# Altium PCB VCO.PcbDoc (part 3 of 3)
Units mil, origin at the board's own origin, x right, y up, seen from the top; angles counter-clockwise.
Board outline 4000 x 2000 mil, 4 copper layers (Top Layer, Signal Layer 1, Signal Layer 2, Bottom Layer), stack 60.6 mil thick; 123 components, 70 nets, 383 pads, 321 vias.
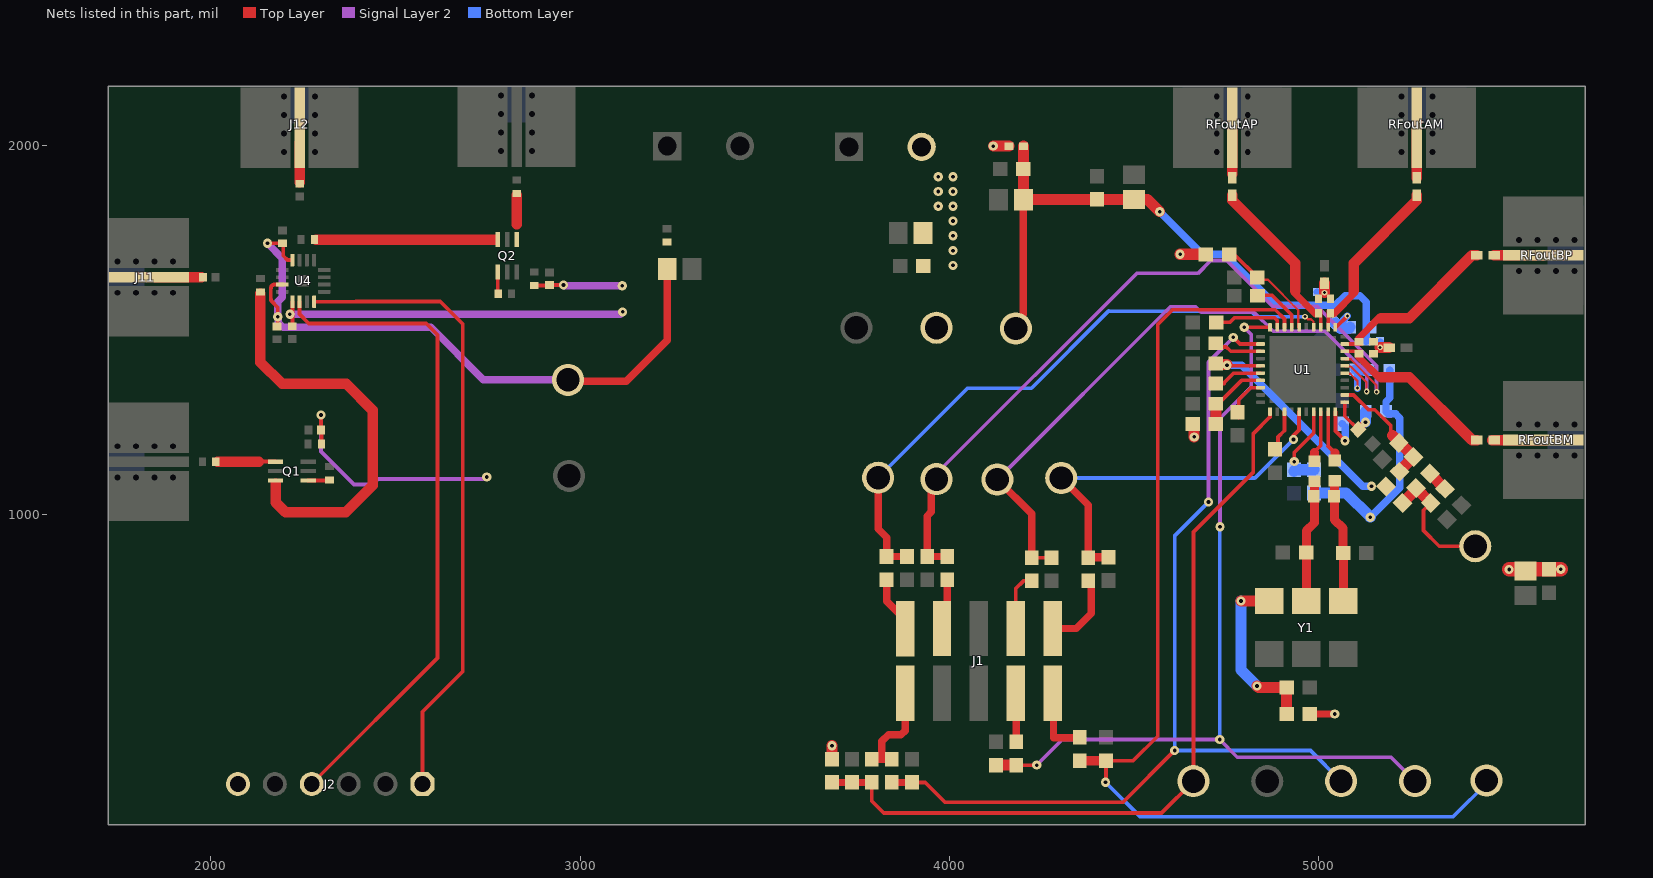
[diagram p4: the nets of this part, all layers, seen from the top]

## Via types
v1: diameter 25, hole 16, Top Layer to Bottom Layer, 152 vias
v2: diameter 25, hole 10, Top Layer to Bottom Layer, 148 vias
v3: diameter 19.68, hole 7.87, Top Layer to Bottom Layer, 12 vias
v4: diameter 15, hole 8, Top Layer to Bottom Layer, 7 vias
v5: diameter 25, hole 10, Top Layer to Bottom Layer, tented both sides, 1 vias
v6: diameter 24, hole 10, Top Layer to Bottom Layer, 1 vias

## Nets (pads, with @x,y where several pads share a name; then routed paths per layer and width w, separated by ;. In a path a pad name is that pad's centre, name@x,y a point inside that pad or via, vN(x,y) a via of type N, cw(c..) or ccw(c..) an arc to the next point about the centre after c; other vN are vias at no path point) (continued)
NetC1_LF_1: C1_LF.1 C2_LF.1 R3_LF.1 U1.12 | length 318.3
  Top Layer w10: U1.12@5071.17,1325.1 5094.9,1325.1 5134.9,1285.1 5152.4,1285.1 5195.43,1242.07 5195.43,1220.03
  Top Layer w30: 5200.2,1215 C2_LF.1@5258.43,1156.77 ; R3_LF.1@5219.53,1117.17 5219.53,1118.97 C2_LF.1@5257.33,1156.77
NetC2_LF_2: C2_LF.2 R2_LF.1 | length 57.7
  Top Layer w30: C2_LF.2@5302.97,1112.23 5302.97,1110.73 R2_LF.1@5342.73,1070.97
NetC3_LF_1: C3_LF.1 R3_LF.2 R4_LF.2 VTune_TP.1 | length 351.6
  Top Layer w10: C3_LF.1@5303.59,1032.37 5284.3,1013.08 5284.3,957.7 5326.7,915.3 VTune_TP.1@5424.3,915.3
  Top Layer w20: R3_LF.2@5264.07,1069.23 R3_LF.2@5264.07,1072.63
  Top Layer w30: R4_LF.2@5227.27,1032.43 R3_LF.2@5264.07,1069.23 ; R3_LF.2@5264.07,1072.63 C3_LF.1@5303.59,1033.11
NetC4_LF_2: C4_LF.2 R4_LF.1 U1.35 | length 673.6
  Top Layer w9.85: C4_LF.2@4722,1410.6 4728.75,1403.84 v2@4751.9,1403.84 ; v2@4759.1,1403.84 U1.35@4842.83,1403.84
  Top Layer w30: C4_LF.2@4722,1408 v2@4752,1408
  Bottom Layer w20: v2(4751.9,1405.5) 4791.9,1405.5 5119.52,1077.88 v2(5143.35,1077.88)
NetC5_1: C5.1 RFoutAP.1 | length 141.4
  Top Layer w24: RFoutAP.1@4766.06,2037.18 RFoutAP.1@4766.06,2051.62 ; RFoutAP.1@4766.5,2037.63 RFoutAP.1@4767,2037.13
  Top Layer w28.5: C5.1@4766,1923.62 RFoutAP.1@4766,2049.9
NetC5_2: C5.2 R37.1 U1.23 | length 478.3
  Top Layer w9.84: R37.1@4999.9,1546.41 R37.1@5006.21,1540.1 ; U1.23@5006.21,1508.17 R37.1@5006.21,1553
  Top Layer w19: 4933.21,1602.59 R37.1@4991.1,1544.7 ; 4940.61,1597.59 4940.61,1610.99
  Top Layer w28.5: C5.2@4766.06,1865.68 4766.06,1852.65 4766,1852.6 4936.3,1682.3 4936.3,1607
NetC6_2: C6.2 L1.2 R37.2 R38.2 | length 46.2
  Top Layer w30: v4@5016.06,1602.05 C6.2@5016.06,1627.88
  Bottom Layer w20: L1.2@4996.42,1603.94 4998.36,1602 v4(5016,1602)
NetC7_1: C7.1 RFoutAM.1 | length 137
  Top Layer w28.5: RFoutAM.1@5266,2048 RFoutAM.1@5266,2049.9 ; C7.1@5266.06,1912.92 RFoutAM.1@5266.06,2048
NetC7_2: C7.2 R38.1 U1.22 | length 478.3
  Top Layer w9.84: U1.22@5025.9,1508.17 R38.1@5025.9,1553 ; R38.1@5025.9,1540.1 R38.1@5032.21,1546.41
  Top Layer w19: R38.1@5041.01,1544.7 5098.9,1602.59 ; 5091.1,1596.1 5091.1,1609.5
  Top Layer w28.5: 5095.81,1607 5095.81,1682.3 5266.11,1852.6 5266.11,1865.62 C7.2@5266.06,1865.68
NetC10_1: C10.1 RFoutBP.1 | length 202.4
  Top Layer w24: RFoutBP.1@5614.72,1703.06 RFoutBP.1@5682,1703.06
  Top Layer w28.5: C10.1@5475.92,1703.11 5475.98,1703.06 RFoutBP.1@5611,1703.06
NetC10_2: C10.2 R39.1 U1.19 | length 469.2
  Top Layer w9.84: U1.19@5071.17,1462.9 R39.1@5116,1462.9
  Top Layer w19: R39.1@5107.7,1478.11 5165.59,1535.9 ; 5162.2,1527.9 5175.6,1527.9
  Top Layer w28.5: 5170,1532.81 5245.3,1532.81 5415.6,1703.11 C10.2@5428.68,1703.11
NetC11_2: C11.2 L2.2 R39.2 R40.1 | length 38.7
  Top Layer w30: v4(5166.7,1453.7) 5167.34,1453.06 C11.2@5190.88,1453.06
  Bottom Layer w20: v4(5166.7,1453.7) L2.2@5166.7,1468
NetC12_1: C12.1 RFoutBM.1 | length 144.7
  Top Layer w24: RFoutBM.1@5614.67,1203 RFoutBM.1@5614.72,1203.06
  Top Layer w28.5: C12.1@5470.04,1203 RFoutBM.1@5614.67,1203
NetC12_2: C12.2 R40.2 U1.18 | length 469.3
  Top Layer w9.84: U1.18@5071.17,1443.21 R40.2@5116,1443.21
  Top Layer w19: R40.2@5107.7,1428.1 5165.59,1370.21 ; 5160,1378 5173.4,1378
  Top Layer w28.5: 5170,1373.3 5245.3,1373.3 5415.6,1203 C12.2@5428.68,1203
NetC13_1: C13.1 R33.1 Y1.6 | length 479
  Top Layer w30: v2(4790.05,767.05) Y1.6@4867,767.05 ; v2(4833,537) 4837,533 C13.1@4913.5,533 R33.1@4913.5,461
  Bottom Layer w30: v2(4790.05,767.05) 4790.05,579.95 v2(4833,537)
NetC14_1: C14.1 R27.2 R32.2 Y1.5 | length 333.3
  Top Layer w24: Y1.5@4967,767.05 4967,897.5 R27.2@4966.5,898 4967,898.5 4967,957 4989,979 C14.1@4989,1090.84
NetC14_2: C14.2 U1.8 | length 150.7
  Top Layer w9.84: 5006.21,1188.21 U1.8@5006.21,1279.83
  Top Layer w10: 4988,1170 5005.5,1187.5
  Top Layer w24: C14.2@4987.9,1148.7 C14.2@4988,1160 ; C14.2@4989,1145.96 4989,1169
NetC15_1: C15.1 R28.2 R32.1 Y1.4 | length 334.1
  Top Layer w24: C15.1@5042.68,1091.04 5042.68,987.32 5066.5,963.5 R28.2@5066.5,897 5067,896.5 Y1.4@5067,767.05
NetC15_2: C15.2 U1.9 | length 137.8
  Top Layer w9.84: 5025.9,1186.89 U1.9@5025.9,1279.83
  Top Layer w10: 5025.5,1186.5 5043,1169
  Top Layer w24: C15.2@5044.18,1147.66 5044.18,1167.82
NetC18_2: C18.2 R36.1 U1.26 | length 296.4
  Top Layer w6: C18.2@4834.3,1643 4840.24,1637.06 4862.78,1637.06 4945,1554.84 U1.26@4945,1508.17
  Top Layer w10: R36.1@4757.7,1705.5 4771.8,1705.5 C18.2@4834.3,1643
NetC19_2: C19.2 U1.27 | length 148.4
  Top Layer w10: C19.2@4834.53,1595.03 4873.87,1595.03 4927.47,1541.43 U1.27@4927.47,1508.17
NetC20_1: C20.1 U1.29 | length 192.4
  Top Layer w9.8: 4759.8,1521.7 4772.3,1534.2 4880.6,1534.2 4888.1,1526.7 U1.29@4888.1,1508.17
  Top Layer w10: C20.1@4722.5,1521.7 4759.8,1521.7
NetC21_2: C21.2 U1.33 | length 116.8
  Top Layer w10: C21.2@4731,1455 4750,1455 4761.79,1443.21 U1.33@4842.87,1443.23
NetC22_1: C22.1 U1.36 | length 134.2
  Top Layer w10: C22.1@4721.8,1356.2 4744.48,1356.2 4744.48,1358.88 4769.76,1384.16 U1.36@4842.87,1384.11
NetC23_2: C23.2 R41.1 U1.37 | length 185.1
  Top Layer w10: C23.2@4736,1309 4791.47,1364.47 U1.37@4842.83,1364.47
  Top Layer w30: R41.1@4721.6,1246.1 4721.6,1301.1 C23.2@4721.8,1301.3
NetC24_2: C24.2 U1.38 | length 121.7
  Top Layer w10: C24.2@4783.6,1263.3 4783.6,1312.4 4815.99,1344.79 U1.38@4842.83,1344.79
NetC25_1: C25.1 U1.3 | length 123.2
  Top Layer w10: C25.1@4888.43,1163.6 4890,1165.16 4890,1211 4907.07,1228.07 ; 4907.79,1228.79 U1.3@4907.79,1279.83
NetC26_2: C26.2 R43.2 U1.11 | length 146.3
  Top Layer w10: U1.11@5071.17,1305.42 5071.17,1267.53 C26.2@5107.21,1231.49
  Top Layer w20: C26.2@5107.21,1231.49 v2(5127.03,1251.3)
  Bottom Layer w30: v2(5127.03,1251.3) 5127.03,1280.06 R43.2@5127.49,1280.52
NetC27_2: C27.2 R42.2 U1.7 | length 212.7
  Top Layer w10: v2(4934,1144.56) 4934,1169 4986.53,1221.53 U1.7@4986.55,1279.87
  Bottom Layer w30: C27.2@4933.3,1118.46 4937.33,1122.49 R42.2@4987.24,1122.49
NetC28_2: C28.2 U1.10 | length 138.8
  Top Layer w10: U1.10@5045.58,1279.83 5045.58,1227.12 v2(5071.7,1201)
  Bottom Layer w20: C28.2@5064.15,1247.01 5071.7,1239.45 v2(5071.7,1201)
NetC29_1: C29.1 R44.2 U1.15 | length 146
  Top Layer w6: U1.15@5071.17,1382.24 5086.1,1382.24 5105.3,1363.04 v4(5105.3,1343.6)
  Bottom Layer w20: C29.1@5103.56,1393 5103.76,1392.8 5105.3,1391.26 v4(5105.3,1343.6)
  Bottom Layer w30: C29.1@5102,1394.56 C29.1@5103.56,1393 ; C29.1@5103.76,1392.8 R44.2@5135.94,1392.8
NetC30_2: C30.2 R45.2 U1.21 | length 126.8
  Top Layer w10: U1.21@5045.58,1508.17 5047.17,1508.17 v4(5078,1539)
  Bottom Layer w20: C30.2@5044.69,1519.69 C30.2@5044.69,1520.19 ; C30.2@5045.71,1519.69 C30.2@5062,1519.69 ; 5066.68,1527.68 v4(5078,1539)
  Bottom Layer w30: C30.2@5044.69,1519.69 5045.71,1519.69 5059.15,1506.25 5059.15,1505.25 5081.79,1505.25 R45.2@5085.45,1508.91
NetC102_1: C102.1 C103.1 C106.1 Hvoltage_TP.1 R107.1 U4.12 U4.15 | length 1858.6
  Top Layer w10: v2(2153,1736) C103.1@2194,1735.99 2195.77,1734.22 2195.77,1701.81 2207.09,1690.5 U4.12@2220.47,1690.5 ; C106.1@3232.2,1662.66 C106.1@3235.74,1666.2
  Top Layer w10.5: C102.1@2179,1510.01 2181,1512.01 v2(2181,1537) 2181,1562 2165.08,1577.92 cw(c2172.5,1585.35) 2162,1585.35 2162,1613.59 cw(c2172.5,1613.59) 2172.5,1624.09 2192.34,1624.09 ccw(c2192.34,1634.59) 2192.89,1624.11 U4.15@2193.48,1624.14
  Top Layer w20: Hvoltage_TP.1@2967,1366 2971,1362 3125,1362 3235.74,1472.74 C106.1@3235.74,1666.2 ; C106.1@3232.2,1662.66 C106.1@3234.2,1660.66
  Signal Layer 2 w20: v2(2153,1736) 2193.5,1695.5 2193.5,1590.18 2181,1577.68 v2(2181,1537) 2181.96,1536.05 2181.96,1521.26 2195.22,1508 2596,1508 2738,1366 Hvoltage_TP.1@2967,1366
NetC107_2: C107.2 J11.1 | length 143
  Top Layer w28.5: J11.1@1831,1644 C107.2@1974,1644
NetC108_2: C108.2 J12.1 | length 107.2
  Top Layer w28.5: J12.1@2240.04,2008.24 C108.2@2240.15,1901
NetCE_TP_1: CE_TP.1 R2.2 R3.2 R4.2 U1.1 | length 2166
  Top Layer w10: R4.2@3790,275.5 3790,225 3822.2,192.8 4574.8,192.8 CE_TP.1@4661,279 4661,953.93 4823.37,1116.3 4823.37,1221 4867.22,1264.85 4868.42,1264.85 U1.1@4868.42,1279.83
  Top Layer w20: R2.2@3682,275.5 R3.2@3736,275.5 R4.2@3790,275.5
NetCSB_TP_1: CSB_TP.1 R16.2 R17.2 U1.24 | length 1677.7
  Top Layer w5: U1.24@4985,1509.7 U1.24@4986.53,1508.17
  Top Layer w6: v4(4963.2,1537.21) 4970.41,1530 4979.67,1530 4986.53,1523.15 U1.24@4986.53,1504.17
  Top Layer w20: CSB_TP.1@3807,1101 3807,962.1 3830,939.1 R16.2@3830,887.5 R17.2@3885,887.5
  Bottom Layer w10: CSB_TP.1@3807,1101 4049.1,1343.1 4222.1,1343.1 4431.3,1552.3 4431.5,1552.1 4816.4,1552.1 4831.3,1537.21 v4(4963.2,1537.21)
NetJ1_1: J1.1 R4.1 R5.2 | length 282
  Top Layer w10: J1.1@3876.5,514 J1.1@3880,517.5
  Top Layer w20: R4.1@3790,338.5 3815,338.5 ; R5.2@3844,338.5 3817,338.5 3817,387 3835,405 3869,405 3880,416 J1.1@3880,517.5
NetJ1_2: J1.2 R16.1 | length 153.7
  Top Layer w20: R16.1@3830,824.5 3830,766 3880,716 J1.2@3880,691.5
NetJ1_4: J1.4 R19.2 | length 137.8
  Top Layer w20: J1.4@3980,692.5 3994,706.5 R19.2@3994,824.5
NetJ1_7: J1.7 R8.1 | length 132.4
  Top Layer w20: J1.7@4180,517.5 4181,516.5 R8.1@4181,385.5
NetJ1_8: J1.8 R20.1 | length 160
  Top Layer w10: J1.8@4180,692.5 4180,801 4200.5,821.5 R20.1@4223,821.5
NetJ1_9: J1.9 R9.1 | length 192.5
  Top Layer w20: J1.9@4280,517.5 4282,515.5 4282,397 4352.5,397 R9.1@4353,397.5
NetJ1_10: J1.10 R22.1 | length 213.3
  Top Layer w20: J1.10@4280,692.5 4344,692.5 4384.5,733 4384.5,813 R22.1@4376,821.5
NetQ1_1: Q1.1 R102.1 | length 157.2
  Top Layer w10.5: 2130,1144 2130.59,1144.59 Q1.1@2174.91,1144.59
  Top Layer w28.5: R102.1@2018,1144 2130,1144
NetQ1_3: Q1.3 R108.2 | length 1101.8
  Top Layer w28.5: R108.2@2134,1599 2134,1414 2193,1355 2366,1355 2438,1283 2438,1080 2365,1007 2202,1007 2174.91,1034.09 2174.91,1085.06
NetQ1_4: Q1.4 R103.2 | length 58.6
  Top Layer w10: Q1.4@2263.09,1093.41 2319.4,1093.41 R103.2@2321,1095.01
NetQ2_1: Q2.1 R105.1 | length 78.9
  Top Layer w28.5: 2828,1787.14 R105.1@2828,1866
NetQ2_3: Q2.3 R109.2 | length 483.6
  Top Layer w28.5: R109.2@2285,1746 2768.56,1746
NetQ2_4: Q2.4 R106.2 | length 59.5
  Top Layer w10: Q2.4@2776.91,1658 2776.91,1600.1 R106.2@2778.01,1599
NetR18_2: R18.2 R19.1 SDI_TP.1 U1.17 | length 2061
  Top Layer w6: U1.17@5071.17,1421.61 5087.07,1421.61 5157,1351.68 v4(5157,1333.4) v4@5160.7,1333.4
  Top Layer w20: SDI_TP.1@3940,1087 3951,1098 3951,1008.3 3940,997.3 R18.2@3940,887.5 R19.1@3994,887.5
  Signal Layer 2 w10: SDI_TP.1@3951,1098 4507.3,1654.3 4673.1,1654.3 4708.04,1689.24 4751.46,1689.24 4875.2,1565.5 4995.38,1565.5 5157,1403.9 v4(5157,1333.4)
NetR20_2: R20.2 R21.2 SCK_TP.1 U1.16 | length 1723.8
  Top Layer w6: U1.16@5071.17,1401.92 5087.16,1401.92 5130.1,1358.98 v4(5130.1,1334.4)
  Top Layer w10: R20.2@4223,884.5 R21.2@4277,884.5
  Top Layer w20: SCK_TP.1@4130,1096 4223,1003 R20.2@4223,884.5
  Signal Layer 2 w10: SCK_TP.1@4130,1096 4598.15,1564.15 4666.93,1564.15 4681.8,1549.28 4825.4,1549.28 4877.18,1497.5 5017.1,1497.5 5130.1,1384.5 v4(5130.1,1334.4)
RAMPCLK: R7.2 R8.2 RampCLK_TP.1 U1.30 | length 2472.6
  Top Layer w10: 4154,322.5 R8.2@4181,322.5 v2(4236.5,322.5) ; v2(4798.83,1508.17) U1.30@4868.42,1508.17
  Top Layer w20: R7.2@4126,322.5 R7.2@4130.5,318
  Top Layer w30: R7.2@4126,322.5 R8.2@4181,322.5
  Signal Layer 2 w10: v2(4236.5,322.5) 4305.99,392 v2(4732,392) 4780,344 5196,344 RampCLK_TP.1@5261,279 ; v2(4733,968) 4733.1,968.1 4733.1,1261.9 4817.2,1346 4817.2,1489.8 v2(4798.83,1508.17)
  Bottom Layer w10: v2(4732,392) 4732,967 v2(4733,968)
RAMPDIR: R5.1 R6.2 RampDIR_TP.1 U1.32 | length 2597.8
  Top Layer w10: R6.2@3899,275.5 3934.5,275.5 3988,222 4470,222 v2(4610,362) ; v2(4769,1481) 4787.1,1462.9 U1.32@4842.87,1462.9
  Top Layer w20: R5.1@3844,275.5 R6.2@3899,275.5
  Signal Layer 2 w10: v2(4702,1035) 4702,1414 v2(4769,1481)
  Bottom Layer w10: v2(4702,1035) 4618,951 4610,943 v2(4610,362) 4978,362 RampDIR_TP.1@5061,279
SCLK: J2.4 U4.2 | length 1788.7
  Top Layer w10.5: U4.2@2240.16,1577.5 2240.16,1543.84 2265,1519 2583,1519 2613.75,1488.25 2613.75,612.75 2273,272 J2.4@2273,271
SS: J2.1 U4.4 | length 1719.1
  Top Layer w10.5: U4.4@2279.53,1577.5 2392.5,1577.5 2393,1578 2621,1578 2682,1517 2682,576 2573,467 J2.1@2573,271
SYNC: R22.2 R23.2 SYNC_TP.1 U1.5 | length 1057.2
  Top Layer w10: v2(4932,1204.5) 4932,1215 4947.16,1230.16 U1.5@4947.16,1279.83
  Top Layer w20: SYNC_TP.1@4303,1100 4376,1027 R22.2@4376,884.5 R22.2@4377,885.5 ; R23.2@4431,885.5 R23.2@4432.5,887
  Top Layer w24: R22.2@4377,885.5 R23.2@4431,885.5
  Bottom Layer w10: SYNC_TP.1@4303,1100 4827.5,1100 v2(4932,1204.5)
SYSREFREQ: R9.2 R10.2 SysRefReq_TP.1 U1.28 | length 2922
  Top Layer w9.8: R10.2@4424,334.5 4497.5,334.5 4564,401 4564,1515.75 4604.25,1556 4882.5,1556 4907.79,1530.71 U1.28@4907.79,1508.17
  Top Layer w10: v2(4423,276) 4424,277 R10.2@4424,334.5
  Top Layer w25: R9.2@4353,334.5 R10.2@4424,334.5
  Bottom Layer w10: v2(4423,276) 4516,183 5365,183 SysRefReq_TP.1@5461,279
VCC: C3.2 C4.2 C16.2 C17.2 C101.2 C104.1 C105.1 J2.6 J3.2 L3.1 R2.1 R33.2 R36.2 R41.2 R42.1 R43.1 R44.1 R101.2 R104.2 U4.1 Vcc_TP.1 | length 2907.5
  Top Layer w10.5: C101.2@2220.01,1506 2220.47,1506.46 U4.1@2220.47,1577.5 ; v2(2298,1271) C104.1@2298.01,1230 2298.99,1229.02 R101.2@2298.99,1192 ; R104.2@2876,1622.01 2916.02,1622.01 C105.1@2917,1622.98 v2(2955,1623)
  Top Layer w20: R33.2@4976.5,461 v2(5044,461)
  Top Layer w30: R2.1@3682,338.5 v2(3682,375) ; v2(4119,1999) L3.1@4161.31,1999 ; v2(4624.98,1706.2) R36.2@4676.1,1706.2 ; R41.2@4658.6,1246.1 4663.1,1241.6 v2(4663.1,1211.5)
  Top Layer w40: J3.2@3924.85,1997 J3.2@3926.85,1999 ; v2@5516.5,853 v2(5656,853)
  Signal Layer 2 w10.5: v2(2298,1271) 2298,1172 2387,1083 2438,1083 2452,1097 2737.08,1097 2743.08,1103 v2(2747,1103)
  Signal Layer 2 w20: v2(2213.78,1543.65) 3108.65,1543.65 v2(3115,1550) ; v2(2955,1623) 2957,1621 v2(3114,1621)
  Bottom Layer w20: v2(3114,1621) v2@3114.5,1620.5 ; v2@3114.5,1550.5 v2(3115,1550) ; v2(5140,994) 5220.2,1074.2 5220.2,1262.07 5208.48,1273.79 5188.35,1273.79 R43.1@5182.6,1279.53 ; R43.1@5182.6,1280.52 5182.6,1287.25 5182.6,1306.5 5192.86,1316.76 R44.1@5192.86,1392.8
  Bottom Layer w30: R42.1@4987.24,1059.5 5074.5,1059.5 v2(5140,994)
  other v2: 5516,852.5 4010,1676 4010,1716 4010,1756 4010,1796 3970,1836 4010,1836 3970,1876 4010,1876 3970,1916 4010,1916
VccRF: C1.2 C2.2 C8.2 C9.2 L1.1 L2.1 L3.2 R45.1 VccRF_TP.1 | length 1673.8
  Top Layer w20: VccRF_TP.1@4180,1505 4180,1523.13 4200.46,1543.59 C2.2@4200.46,1854
  Top Layer w30: L3.2@4200.69,1999 4200.69,1937.19 C1.2@4200.5,1937 4200.5,1855.03 4201.02,1854.5 C9.2@4400,1854.5 C8.2@4500,1854.54 ; C8.2@4500,1854.54 4536.46,1854.54 v2(4569.6,1821.4)
  Bottom Layer w20: v2(4569.6,1821.4) 4656.3,1734.7 4684.7,1706.3 4745.3,1706.3 4884,1567.6 5044.8,1567.6 5071.4,1594.2 5112.1,1594.2 5129.5,1576.8 L2.1@5129.5,1470.8
pads on no net: J1.5 U4.5 U4.6 U4.8 U4.16 Y1.1 Y1.2

## Polygon pours and split planes (outlines as drawn)
GND on Top Layer "GND_L01_P138" (solid, remove dead copper, pour order 138): 5696.3,1042.5 5439.4,1042.5 5188.3,1293.6 4609.6,1872.3 4609.6,2133.5 5703.5,2133.5
GND on Top Layer "GND_L01_P143" (solid, remove dead copper, pour order 143): 2403,2155.03 2403,1833.65 2145.67,1486 1725.5,1486 1725.5,2159.5
GND on Top Layer "GND_L01_P145" (solid, remove dead copper, pour order 145): 2268.43,2160.21 3061.19,2160.21 3061.19,1680 2265.26,1680
GND on Top Layer "GND_L01_P144" (solid, remove dead copper, pour order 144): 2557,1488.15 2557,862.99 1720.84,863 1720.84,1493.67
VCC on Signal Layer 2 "VCC_L03_P122" (solid, remove dead copper, pour order 122): 2008,484 2008,170 5684.4,170 5684.4,1022.6 5683.3,1023.7 5412.8,1023.7 5155.9,1280.6 4861.4,1280.6 4860.7,1281.3 4860.7,1569.3 4678.2,1751.8 4287,2143 3074,2143 3074,1550
GND on Signal Layer 1 "GND_L02_P142" (solid, remove dead copper, pour order 142): 5697.7,171.21 5697.7,2142.1 3277.7,2142.1 1722,2142.1 1722,171.21 3419.51,171.21 5554.39,171.21
GND on Bottom Layer "GND_L04_P126" (solid, remove dead copper, pour order 126): 1722,2136.03 5671.88,2136.03 5671.88,168 1722,168

## Keep-outs
Top Layer:
  region: 3848,2083

## Other copper
Top Layer:
  rectangle net GND: 4868.42,1305.42 5046,1483
  pour cut-out: 1972,1119.27 2018,1119.27 2018,1168.73 1972,1168.73
  pour cut-out: 2852.73,1866 2852.73,1912 2803.27,1912 2803.27,1866
  pour cut-out: 2853,1850
  pour cut-out: 2264,1940 2265,1939 2265,1822 2216,1822 2215.42,1822.58 2215.42,1939.42 2216,1940
  pour cut-out: 1962,1669 2029,1669 2029,1619 1962,1619
  region net NetC102_1: 3222.2,1749.2 3222.2,1682.2 3239.2,1682.2 3247.2,1690.2 3247.2,1749.2
  region net 15V: 3222,1765 3222,1934.5 3197,1959.5 3197,2037.5 3274,2037.5 3274,1960.5 3247,1933.5 3247,1765
  pour cut-out: 2350,1699
  pour cut-out: 2339,1730
  pour cut-out: 2330,1720
  pour cut-out: 2362.2,1732.28 2291.34,1732.28 2275.59,1732.28
  pour cut-out: 2264.88,1735.25
  region net NetQ2_1: 2814,1787.14 2828,1742.14 2842,1787.14
  region net Dout2: 2226,1735.1 2240,1690.1 2254.3,1735.1
  region net Dout1: 2151.59,1629.86 2195.91,1644.59 2151.59,1658.12
  region net NetQ1_1: 2130.59,1129.86 2174.91,1144.59 2130.59,1158.12
  region net NetQ1_1: 2131,1130
  region net GND: 3650,2087 3650,1885 3794,1741 3794,1648 3886,1648 3886,1734 3887,1735 3887,1854 3817,1924 3817,2088 3801,2104 3669,2104
  region net VCC: 3903,1896 3846,1953 3846,2076 3873,2103 4026,2103 4045,2084 4045,1663 4026,1644 3913,1644 3903,1654
  region net NetC6_2: 5041.9,1597.4 5041.9,1597.8 5027.6,1612.1 5027.5,1612 5004.1,1612 5004.1,1611.6 4989.9,1597.4 4990,1597.3 4990,1573.8 5041.9,1573.8 5041.8,1573.9 5041.8,1597.7
  region net NetC11_2: 5160.6,1427 5161,1427 5175.3,1441.3 5175.2,1441.4 5175.2,1464.8 5174.8,1464.8 5160.6,1479 5160.5,1478.9 5137,1478.9 5137,1427 5137.1,1427.1 5160.9,1427.1
  pour cut-out: 4741.3,1928.5 4741.5,1928.3 4741.5,1859.3 4787.24,1859.3 4790.9,1862.96 4790.9,1928.5 4741.4,1928.5 4741.3,1928.4
  pour cut-out: 5241.5,1919 5241.39,1918.89 5241.39,1862.96 5288.17,1862.96 5290.84,1865.62 5290.6,1865.86 5290.6,1916.3 5244.5,1916.3 5241.5,1919.3
  pour cut-out: 5481,1727.9 5420.7,1727.9 5420.7,1686.4 5428.8,1678.3 5479.2,1678.3 5479.2,1725.7 5481.2,1727.7
  pour cut-out: 5426.8,1177.9 5427.2,1178.3 5474.6,1178.3 5474.6,1227.1 5475,1227.5 5474.77,1227.73 5425.84,1227.73 5425.84,1179.66 5426.8,1178.7

## Silkscreen, mask and mechanical layers (free items; w line width, h text height)
Top Overlay:
  circle w20: c4867.9,1238.5 r7.07
  text "Input2" at 3032,1999 h30 r90
  text "+3V3" at 4090,1999 h30 r90
  text "+15V" at 3118,1982 h30 r90
  text "Output2" at 2069,1962 h30 r90
  text "Output1" at 1732,1817 h30
  text "GND" at 3370,1768 h30
  text "GND" at 3678,1761 h30
  text "Input1" at 1736,1315 h30
  text "CSB" at 3272,811 h40 r90
  text "SDI" at 3328,808 h40 r90
  text "SCK" at 3419,808 h40 r90
  text "SYNC" at 3475,808 h40 r90
  text "RAMPDIR" at 3272,616 h40 r90
  text "MUXout" at 3328,613 h40 r90
  text "GND" at 3371,613 h40 r90
  text "RampCLK" at 3417,610 h40 r90
  text "SysRefReq" at 3472,610 h40 r90
  text "VCC" at 2096,355 h40 r90
  text "GND" at 2192,354 h40 r90
  text "MOSI" at 2490,354 h40 r90
  text "SCLK" at 2292,351 h40 r90
  text "SS" at 2590,350 h40 r90
Bottom Overlay:
  lines w3: 4759,1296 4763,1299
Top Solder:
  rectangle: 5067,1433 5085,1444
  pour cut-out: 5062.36,1607.57 5053.27,1612.36 5064.05,1636.6 5073.1,1632.19
  pour cut-out: 4979,1640 4970,1635 4979,1614 4990,1619 4980,1640
  lines w50: 5016.5,1528.2 5017.03,1545.02 ; 5097.3,1452 5114.12,1451.47 ; 5428.68,1203 5693,1203
  lines w70: 1722,1144 1977.01,1144 ; 1722,1644 1977.99,1644 2149,1644 ; 2001,1144 1989,1144 2012.99,1144 ; 2018,1144 2119,1144 ; 2240.15,1735.1 2240.15,2144.15 2240.15,1897.01 ; 2279.99,1746 2749,1746 ; 2828,1787.14 2828,1871.01 2828,1906.99 ; 2828,1912 2828,2161 ; 4766.39,1872.7 4767.7,2151.1 ; 4766.65,1853.88 4941.4,1675.6 4942.27,1609.62 ; 4943.11,1600.1 4998.15,1545.12 ; 5041.92,1547.55 5083.15,1588.48 ; 5083.75,1587.79 5083.71,1665.58 5268.61,1855.08 ; 5111.85,1476.2 5166.83,1531.24 ; 5119.5,1431.7 5176.62,1373.31 5244.79,1373.35 ; 5158.6,1530.1 5236.39,1530.15 ; 5245.3,1532.81 5415.6,1703.11 5694,1701.8 ; 5265.19,1866.8 5266.5,2145.2
  lines w80: 5245.3,1373.3 5415.6,1203
Bottom Solder:
  rectangle: 4867.2,1304 5047.8,1484.6
Drill Guide:
  text ".Layer_Name" at 327,-1618.49 h25
M1 Board Outline:
  the board outline again, w4
M5 Assembly Top:
  lines w10: -542,-1283.5 -542,-1893.5 3463,-1893.5 6060,-1893.5 ; -541.5,-1283.5 -541.5,-1893.5 1034,-1893.5
  text "ALL SMA CONNECTORS TO FLUSH TO THE EDGE OF THE BOARD, NO GAP ALLOWED." at 3227.1,2684.2 h40
  text "This is especially critical for:  RFoutAP, RFoutAM, RFoutBP, and RFoutBM SMA connectors" at 3214.1,2574.4 h40
  text "Pin1" at 4875.3,1238.8 h20 r90
M6 Assembly Bottom:
  lines w10: -542.5,-1284 -542.5,-1894 2054.5,-1894 6059.5,-1894 ; 4483.5,-1894 6059,-1894
  text "PLOT NAME =" at 5996,-1824.84 h20
M9 Title Sheet:
  lines w10: -741.5,281.5 -541.5,281.5 ; -741.5,2656.5 -541.5,2656.5 ; -741.5,5031.5 -541.5,5031.5 ; 1758.5,-2093.5 1758.5,-1893.5 ; 4258.5,-2093.5 4258.5,-1893.5 ; 4258.5,7206.5 4258.5,7406.5 ; 6758.5,-2093.5 6758.5,-1893.5 ; 6758.5,7206.5 6758.5,7406.5 ; 9258.5,-2093.5 9258.5,-1893.5 ; 9258.5,7206.5 9258.5,7406.5 ; 11758.5,7206.5 11758.5,7406.5 ; 14058.5,281.5 14258.5,281.5 ; 14058.5,2656.5 14258.5,2656.5 ; 14058.5,5031.5 14258.5,5031.5 ; -741.5,-2093.5 14258.5,-2093.5 14258.5,7406.5 -741.5,7406.5 -741.5,-2093.5 ; -541.5,-1893.5 14058.5,-1893.5 14058.5,7206.5 -541.5,7206.5 -541.5,-1893.5
  text "1" at 489.84,7276.5 h70
  text "3" at 5474.84,7276.5 h70
  text "4" at 7981.51,7276.5 h70
  text "5" at 10480.5,7276.5 h70
  text "6" at 12985.5,7276.5 h70
  text "A" at -666.5,6133.5 h70
  text "A" at 14133.5,6133.5 h70
  text "B" at -666.5,3753.5 h70
  text "B" at 14133.5,3753.5 h70
  text "C" at -666.5,1378.5 h70
  text "C" at 14133.5,1378.5 h70
  text "D" at -666.5,-991.5 h70
  text "D" at 14133.5,-991.5 h70
  text "1" at 489.84,-2023.5 h70
  text "2" at 2985.5,-2023.5 h70
  text "3" at 5474.84,-2023.5 h70
  text "4" at 7981.51,-2023.5 h70
  text "5" at 10480.5,-2023.5 h70
M10 Fab Notes:
  drawing of 223 lines, arcs and shapes, not listed
  text "DESIGN INFORMATION" at 12134.02,6047 h25
  text "(REFER ALSO ARRAY/PANEL PROFILING INFORMATION)" at 11772.46,5885.29 h25
  text "BOARD SIZE" at 11086.46,5881 h25
  text "Finished copper thickness." at 29.7,5810 h100
  text "X" at 12054.46,5753.18 h25
  text "2479MIL" at 12285.78,5753.18 h25
  text "2169MIL" at 11540.78,5745.18 h25
  text "28.5 mil width on top layer should be controlled 50 ohms +/- 5%" at -58,5557 h100
  text "Number of Layers :" at 11489.46,5556 h25
  text "4" at 12584.27,5546 h25
  text "MIN. TRACK WIDTH:" at 11489.46,5417 h25
  text "MIL" at 12740.46,5417 h25
  text "6" at 12577.7,5409 h25
  text "21mil width on bottom layer should be controlled 50 ohms +/- 5%" at -91.3,5329.1 h100
  text "MIN. CLEARANCE:" at 11489.46,5285 h25
  text "6" at 12585.7,5285 h25
  text "MIL" at 12740.46,5285 h25
  text "MIN. VIA PAD SIZE:" at 11489.46,5153 h25
  text "15" at 12555.71,5153 h25
  text "MIL" at 12740.46,5153 h25
  text "GROUND COPPER ON TOP, LAYER2 AND BOTTOM TO NOT TO BE PULLED BACK,  BY DESIGN" at 39.7,5146.7 h100
  text "0.05mm (2MIL)" at 12184.46,5011.29 h25
  text "MINIMUM ANNULAR RING" at 11160.23,5007 h25
  text "EXTERNAL" at 12892.46,5007 h25
  text "PER" at 11360.23,4889 h25
  text "IPC-D-275 CLASS 2 LEVEL C" at 11580.23,4889 h25
  text "MIL, HOLES" at 13068.46,4776.71 h25
  text "+/-" at 12676,4776 h25
  text "+/-" at 13530,4776 h25
  text "REGISTRATION TOLERANCES:" at 11160.23,4771 h25
  text "METAL" at 12360,4771 h25
  text "5" at 12936.2,4771 h25
  text "3" at 13769.2,4771 h25
  text "MIL" at 13885.46,4771 h25
  text "MATERIAL:" at 11125.46,4631.54 h25
  text "FR4 High Tg" at 12111.9,4491.21 h25
  text "X" at 12851,4484 h25
  text "FR-408" at 11546.46,4482.64 h25
  text "RO4003C" at 13034.46,4482.64 h25
  text "62 MIL (1.6mm) +/-10%" at 11866.56,4319.92 h25
  text "THICKNESS:" at 11200.23,4315.64 h25
  text "X" at 11738.4,4315.64 h25
  text "OTHER" at 13151.46,4315.64 h25
  text "TOLERANCE:" at 11200.23,4157.64 h25
  text "X" at 12039.53,4157.64 h25
  text "ANSI IPC-6012 TYPE 3 CLASS 2" at 12226.48,4157.64 h25
  text "OTHER +/-" at 12226.46,4001.64 h25
  text "BOW & TWIST:" at 11200.23,3844.64 h25
  text "X" at 12039.53,3844.64 h25
  text "ANSI IPC-6012 TYPE 3 CLASS 2" at 12226.48,3844.64 h25
  text "OTHER +/-" at 12226.46,3686.13 h25
  text "COPPER THICKNESS (FINISHED):" at 11125.46,3550.64 h25
  text "1.4MIL (1oz)" at 12005.46,3397.92 h25
  text "2MIL (1.4oz)" at 12772.46,3397.92 h25
  text "2.8MIL (2oz)" at 13499.46,3397.92 h25
  text "OUTER:" at 11482.46,3393.64 h25
  text "X" at 11877,3393 h25
  text "1.4MIL (1oz)" at 12005.46,3240.92 h25
  text "2.8MIL (2oz)" at 12772.46,3240.92 h25
  text "N/A" at 13499,3241.29 h25
  text "INNER SIGNAL:" at 11193.38,3236.64 h25
  text "X" at 11878.42,3236.64 h25
  text "DRILLING:" at 11125.46,3097.64 h25
  text "REFERENCE:" at 11200.23,2980.64 h25
  text "X" at 11848.46,2980.64 h25
  text "AS SHOWN" at 12035.46,2980.64 h25
  text "X" at 12749.46,2980.64 h25
  text "NC_DRILL FILES" at 12886.46,2980.64 h25
  text "PTH MIN COPPER THICKNESS:" at 11200.23,2822.64 h25
  text "X" at 12550.46,2822.64 h25
  text "1MIL" at 12687.46,2822.64 h25
  text "OTHER" at 13184.46,2822.64 h25
  text "BOARD FINISH:" at 11125.46,2663.64 h25
  text "SILKSCREEN:" at 11280.68,2545.64 h25
  text "X" at 12229.46,2545.64 h25
  text "TOP" at 12355.46,2545.64 h25
  text "X" at 12739.46,2545.64 h25
  text "BOTTOM" at 12866.46,2545.64 h25
  text "SILKSCREEN COLOR:" at 11280.68,2378.64 h25
  text "X" at 12228.42,2378.64 h25
  text "WHITE" at 12355.46,2378.64 h25
  text "OTHER" at 12866.46,2378.64 h25
  text "NO BURR ALLOWED ON THESE 2 SIDES OF THE FABRICATION." at 5873,2297 h100
  text "SOLDER RESIST COLOR:" at 11280.68,2208.64 h25
  text "X" at 12422.42,2072.44 h25
  text "GREEN" at 11960.46,2069.44 h25
  text "BLUE" at 12551.46,2069.44 h25
  text "OTHER" at 13089.46,2069.44 h25
  text "IMMERSION GOLD (ENIG)" at 12176.46,1915.92 h25
  text "ENEPIG" at 13514,1912.64 h25
  text "SURFACE FINISH:" at 11115.46,1911.64 h25
  text "X" at 11989.51,1911.64 h25
  text "IMM. TIN/SILVER OR EQUIV" at 11445,1754.64 h25
  text "OTHER" at 12876.46,1754.64 h25
  text "ARRAY/PANEL:" at 11115.46,1575.64 h25
  text "CUT AND TRIM PER MECH LAYER 1" at 12176.46,1571.35 h25
  text "N.C. ROUTE" at 12176.46,1419.64 h25
  text "V. SCORE" at 13042.46,1419.64 h25
  text "X" at 11977,1416 h25
  text "CERTIFICATION:" at 11115.46,1282.64 h25
  text "MATERIALS AND WORKMANSHIP FOR ALL PCBS" at 11840.46,1282.64 h25
  text "TO MEET OR EXCEED THE REQUIREMENTS OF:" at 11840.46,1184.64 h25
  text "X" at 11466.96,1048.13 h25
  text "ANSI IPC-A-600F CLASS ->" at 11605.96,1048.13 h25
  text "X" at 13245.02,1048.13 h25
  text "2" at 13363.96,1048.14 h25
  text "1" at 13048.96,1046.64 h25
  text "3" at 13717.96,1046.64 h25
  text "X" at 11469.02,888.64 h25
  text "UL 94V-0" at 11605.96,888.64 h25
  text "X" at 12281.02,888.64 h25
  text "RoHS" at 12417.96,888.64 h25
  text "OTHER" at 13062.36,888.64 h25
  text "PER ORDER" at 13459.42,888.64 h25
  text "ADDITIONAL REQUIREMENTS:" at 11115.46,732.64 h25
  text "MICROSECTION:" at 11200.23,602.64 h25
  text "YES" at 12105.96,602.64 h25
  text "REQUIRED" at 12967.46,476.49 h25
  text "BARE BOARD ELEC. TEST:" at 11200.23,473.64 h25
  text "NONE" at 12505.96,473.64 h25
  text "X" at 12840.46,473.64 h25
  text "PER ORDER" at 13559.46,473.64 h25
  text "MANUFACTURER'S UL:" at 11200.23,316.64 h25
  text "RAIL" at 12365.96,312.35 h25
  text "METAL" at 12857.77,312.35 h25
  text "X" at 13233,312 h25
  text "SILK" at 13369.46,312.35 h25
  text "Note: Not put solder on U1 (LMX2592 IC) footprint if IC is not installed." at 11095,175 h42
M11 Gerber Information:
  lines w10: -542,-1283.5 -542,-1893.5 3463,-1893.5 ; -541.5,-1283.5 -541.5,-1893.5 1034,-1893.5
M12 Stackup:
  drawing of 760 lines, arcs and shapes, not listed
  text "Layer" at 1789.17,3671 h30
  text "Name" at 2004.13,3671 h30
  text "Material" at 2484,3671 h30
  text "Thickness" at 2923.88,3671 h30
  text "Constant" at 3258.8,3671 h30
  text "Board Layer Stack" at 3553.73,3671 h30
  text "Board Layer Stack" at 4123.57,3671 h30
  text "Board Layer Stack" at 4693.41,3671 h30
  text "Board Layer Stack" at 5263.26,3671 h30
  text "Top Overlay" at 2004.13,3611 h30
  text "Top Solder" at 2004.13,3551 h30
  text "Solder Resist" at 2484,3551 h30
  text "0.40mil" at 2923.88,3551 h30
  text "3.5" at 3258.8,3551 h30
  text "1" at 1789.17,3491 h30
  text "Top Layer" at 2004.13,3491 h30
  text "Copper" at 2484,3491 h30
  text "1.40mil" at 2923.88,3491 h30
  text "Dielectric1" at 2004.13,3431 h30
  text "Rogers4003C" at 2484,3431 h30
  text "16.00mil" at 2923.88,3431 h30
  text "3.38" at 3258.8,3431 h30
  text "2" at 1789.17,3371 h30
  text "Signal Layer 1" at 2004.13,3371 h30
  text "Copper" at 2484,3371 h30
  text "1.40mil" at 2923.88,3371 h30
  text "Dielectric 3" at 2004.13,3311 h30
  text "27.00mil" at 2923.88,3311 h30
  text "4.1" at 3258.8,3311 h30
  text "3" at 1789.17,3251 h30
  text "Signal Layer 2" at 2004.13,3251 h30
  text "Copper" at 2484,3251 h30
  text "1.40mil" at 2923.88,3251 h30
  text "Dielectric 2" at 2004.13,3191 h30
  text "12.00mil" at 2923.88,3191 h30
  text "4.1" at 3258.8,3191 h30
  text "4" at 1789.17,3131 h30
  text "Bottom Layer" at 2004.13,3131 h30
  text "Copper" at 2484,3131 h30
  text "1.40mil" at 2923.88,3131 h30
  text "Bottom Solder" at 2004.13,3071 h30
  text "Solder Resist" at 2484,3071 h30
  text "0.40mil" at 2923.88,3071 h30
  text "3.5" at 3258.8,3071 h30
  text "Bottom Overlay" at 2004.13,3011 h30
Drill Drawing:
  circle w10: c6295.48,3537.67 r16.67
  lines w10: 6278.81,3146 6295.48,3154.34 6312.15,3146 6303.81,3162.67 6312.15,3179.34 6295.48,3171 6278.81,3179.34 6287.15,3162.67 6278.81,3146 ; 6278.81,3254.34 6312.15,3254.34 6295.48,3221 6278.81,3254.34 ; 6278.81,3296 6312.15,3296 6312.15,3329.34 6278.81,3329.34 6278.81,3296 ; 6278.81,3379.34 6287.15,3379.34 6295.48,3371 6303.81,3379.34 6312.15,3379.34 6303.81,3387.67 6312.15,3396 6303.81,3396 6295.48,3404.34 6287.15,3396 6278.81,3396 6287.15,3387.67 6278.81,3379.34 ; 6278.81,3462.67 6295.48,3446 6312.15,3462.67 6295.48,3479.34 6278.81,3462.67 ; 6278.81,3604.34 6287.15,3604.34 6287.15,3596 6303.81,3596 6303.81,3604.34 6312.15,3604.34 6312.15,3621 6303.81,3621 6303.81,3629.34 6287.15,3629.34 6287.15,3621 6278.81,3621 6278.81,3604.34
  lines w12: 6247.36,3123.5 10002.35,3123.5 ; 6247.36,3648.5 10002.35,3648.5 ; 6538.79,3048.5 6538.79,3723.5 ; 6873.71,3048.5 6873.71,3723.5 ; 7562.51,3048.5 7562.51,3723.5 ; 7831.45,3048.5 7831.45,3723.5 ; 8214.35,3048.5 8214.35,3723.5 ; 8974.13,3048.5 8974.13,3723.5 ; 9530.97,3048.5 9530.97,3723.5 ; 6247.36,3048.5 10002.35,3048.5 10002.35,3723.5 6247.36,3723.5 6247.36,3048.5
  text "Symbol" at 6292.36,3671 h36
  text "Quantity" at 6561.29,3671 h36
  text "Finished Hole Size" at 6896.21,3671 h36
  text "Plated" at 7585.01,3671 h36
  text "Hole Type" at 7853.95,3671 h36
  text "Drill Layer Pair" at 8236.85,3671 h36
  text "Hole Tolerance" at 8996.63,3671 h36
  text "Hole Length" at 9553.47,3671 h36
  text "12" at 6561.29,3596 h30
  text "7.87mil (0.200mm)" at 6896.21,3596 h30
  text "PTH" at 7585.01,3596 h30
  text "Round" at 7853.95,3596 h30
  text "Top Layer - Bottom Layer" at 8236.85,3596 h30
  text "-" at 9553.47,3596 h30
  text "7" at 6561.29,3521 h30
  text "8.00mil (0.203mm)" at 6896.21,3521 h30
  text "PTH" at 7585.01,3521 h30
  text "Round" at 7853.95,3521 h30
  text "Top Layer - Bottom Layer" at 8236.85,3521 h30
  text "-" at 9553.47,3521 h30
  text "150" at 6561.29,3446 h30
  text "10.00mil (0.254mm)" at 6896.21,3446 h30
  text "PTH" at 7585.01,3446 h30
  text "Round" at 7853.95,3446 h30
  text "Top Layer - Bottom Layer" at 8236.85,3446 h30
  text "-" at 9553.47,3446 h30
  text "216" at 6561.29,3371 h30
  text "16.00mil (0.406mm)" at 6896.21,3371 h30
  text "PTH" at 7585.01,3371 h30
  text "Round" at 7853.95,3371 h30
  text "Top Layer - Bottom Layer" at 8236.85,3371 h30
  text "-" at 9553.47,3371 h30
  text "6" at 6561.29,3296 h30
  text "43.31mil (1.100mm)" at 6896.21,3296 h30
  text "PTH" at 7585.01,3296 h30
  text "Round" at 7853.95,3296 h30
  text "Top Layer - Bottom Layer" at 8236.85,3296 h30
  text "-" at 9553.47,3296 h30
  text "4" at 6561.29,3221 h30
  text "51.18mil (1.300mm)" at 6896.21,3221 h30
  text "PTH" at 7585.01,3221 h30
  text "Round" at 7853.95,3221 h30
  text "Top Layer - Bottom Layer" at 8236.85,3221 h30
  text "-" at 9553.47,3221 h30
  text "15" at 6561.29,3146 h30
  text "63.00mil (1.600mm)" at 6896.21,3146 h30
  text "PTH" at 7585.01,3146 h30
  text "Round" at 7853.95,3146 h30
  text "Top Layer - Bottom Layer" at 8236.85,3146 h30
  text "-" at 9553.47,3146 h30
  text "410 Total" at 6561.29,3071 h30

## Dimensions
5722,2161 to 5722,161 on M2 Board Dimensions
1722,161 to 5722,161 on M2 Board Dimensions

## Text inside footprints (layer, text, board x,y; h text height)
J3: M13 Component Bodies Top "NAME" at 3626.15,2197.28 h50.07; M13 Component Bodies Top "VALUE" at 3625.92,1746.37 h50.13
J4: M13 Component Bodies Top "NAME" at 3134.15,2199.28 h50.07; M13 Component Bodies Top "VALUE" at 3133.92,1748.37 h50.13
Logo3: Bottom Overlay "Pb" at 5650.25,429.18 h120